# Altium PCB SWC_PCB1.PcbDoc
Units mm, origin at the board's own origin, x right, y up, seen from the top; angles counter-clockwise.
Board outline 45 x 51 mm, 2 copper layers (Top Layer, Bottom Layer); 74 components, 51 nets, 201 pads, 39 vias.
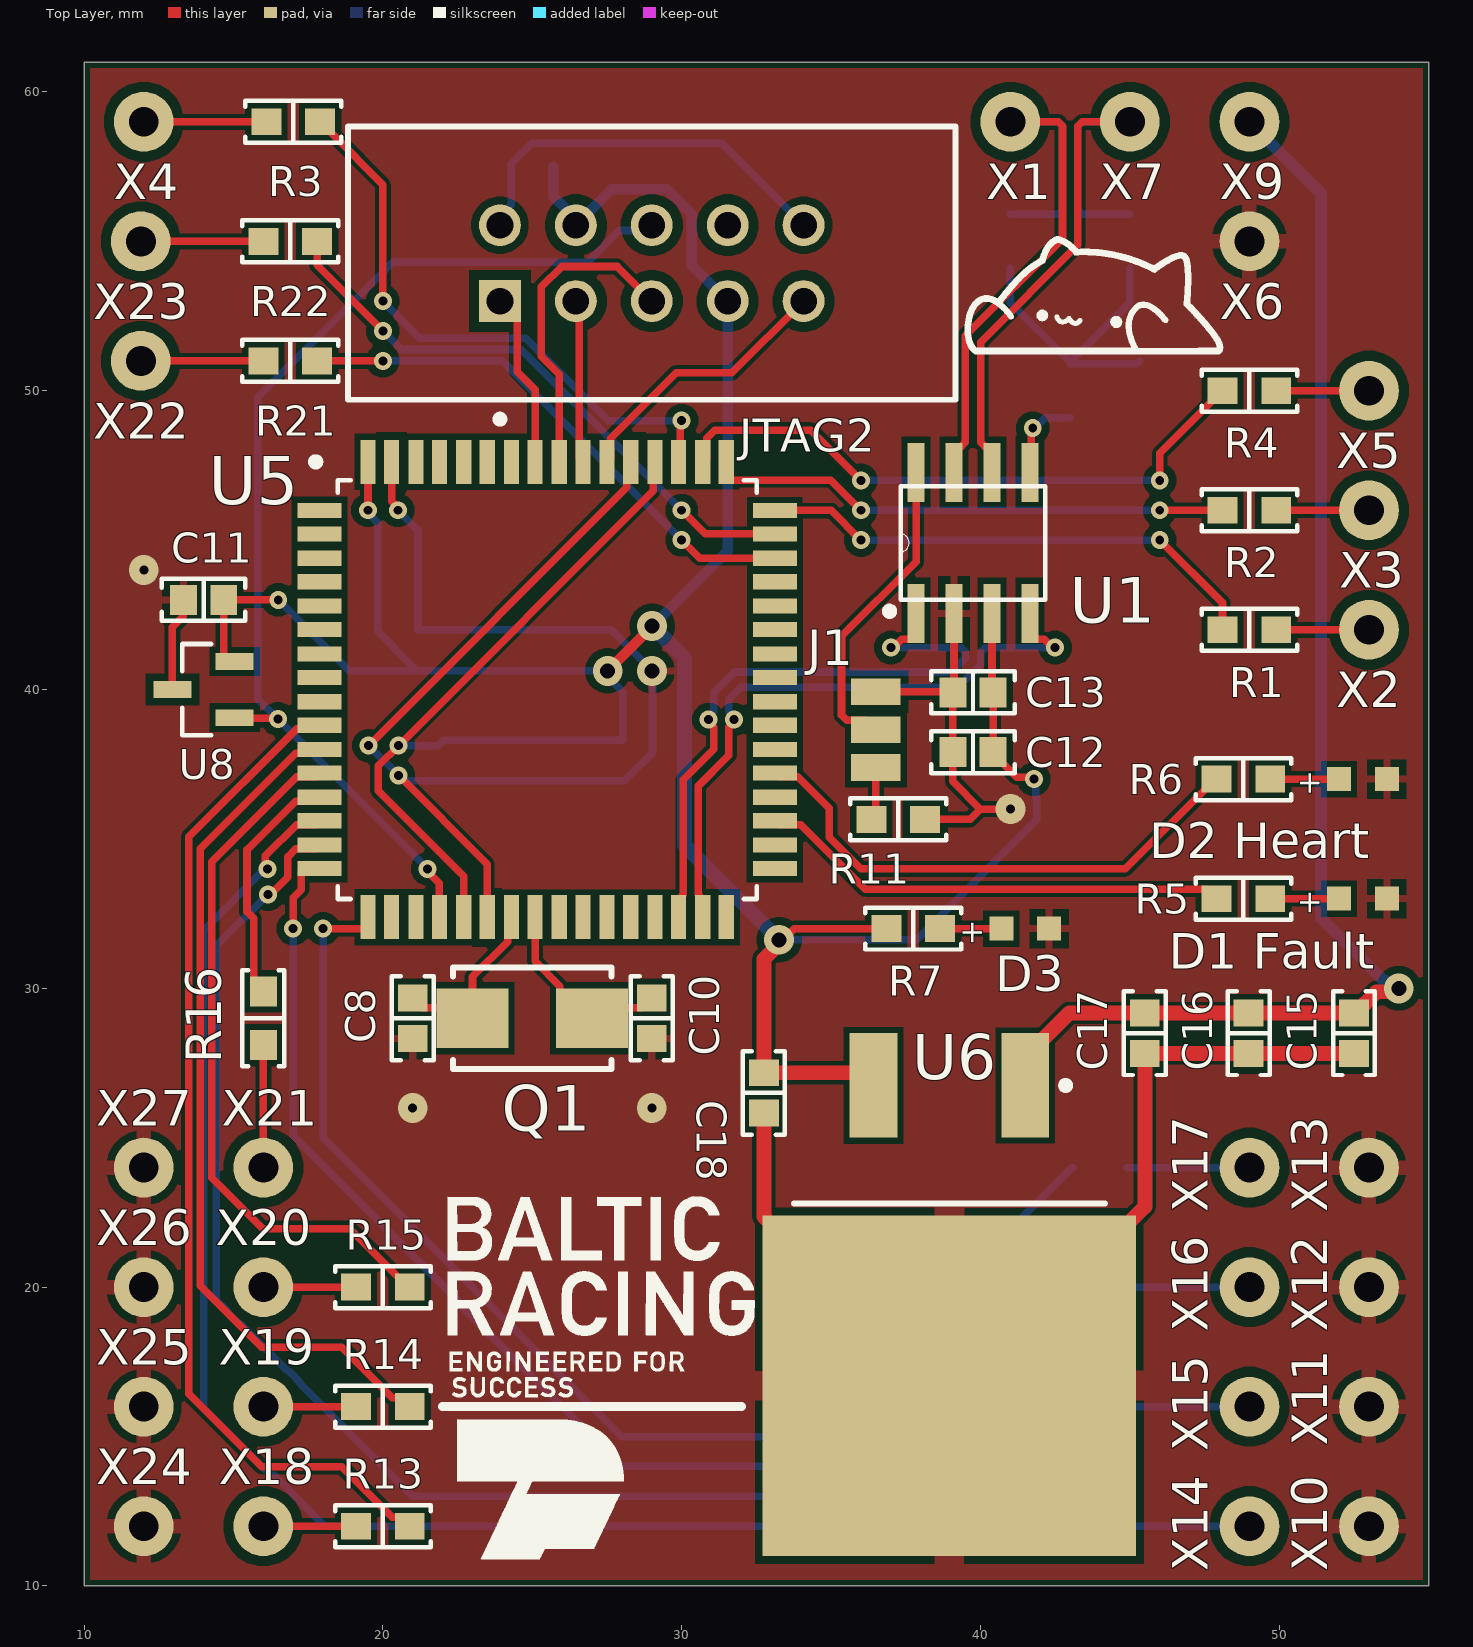
[diagram p0: Top Layer view]
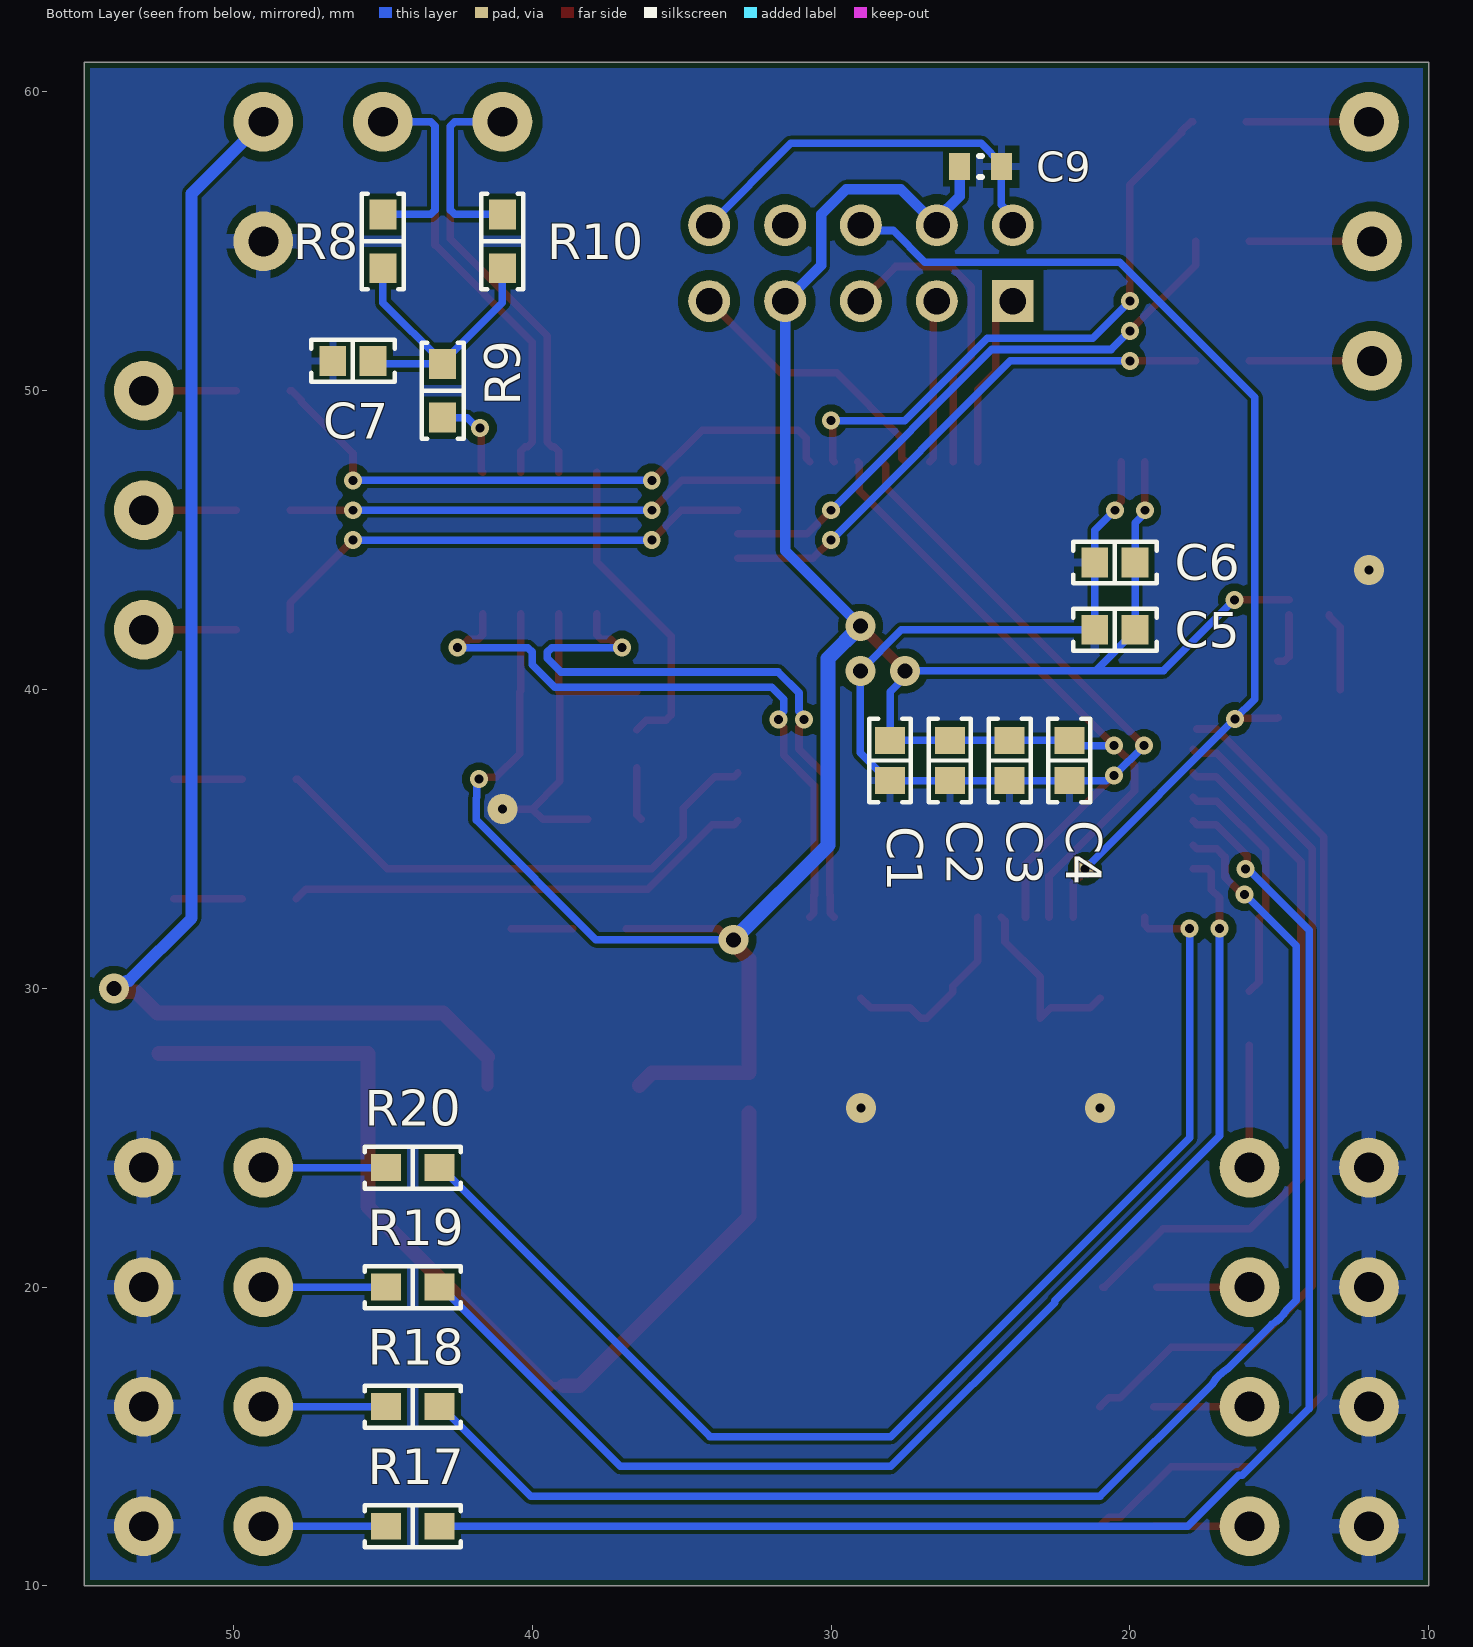
[diagram p1: Bottom Layer view, seen from below]
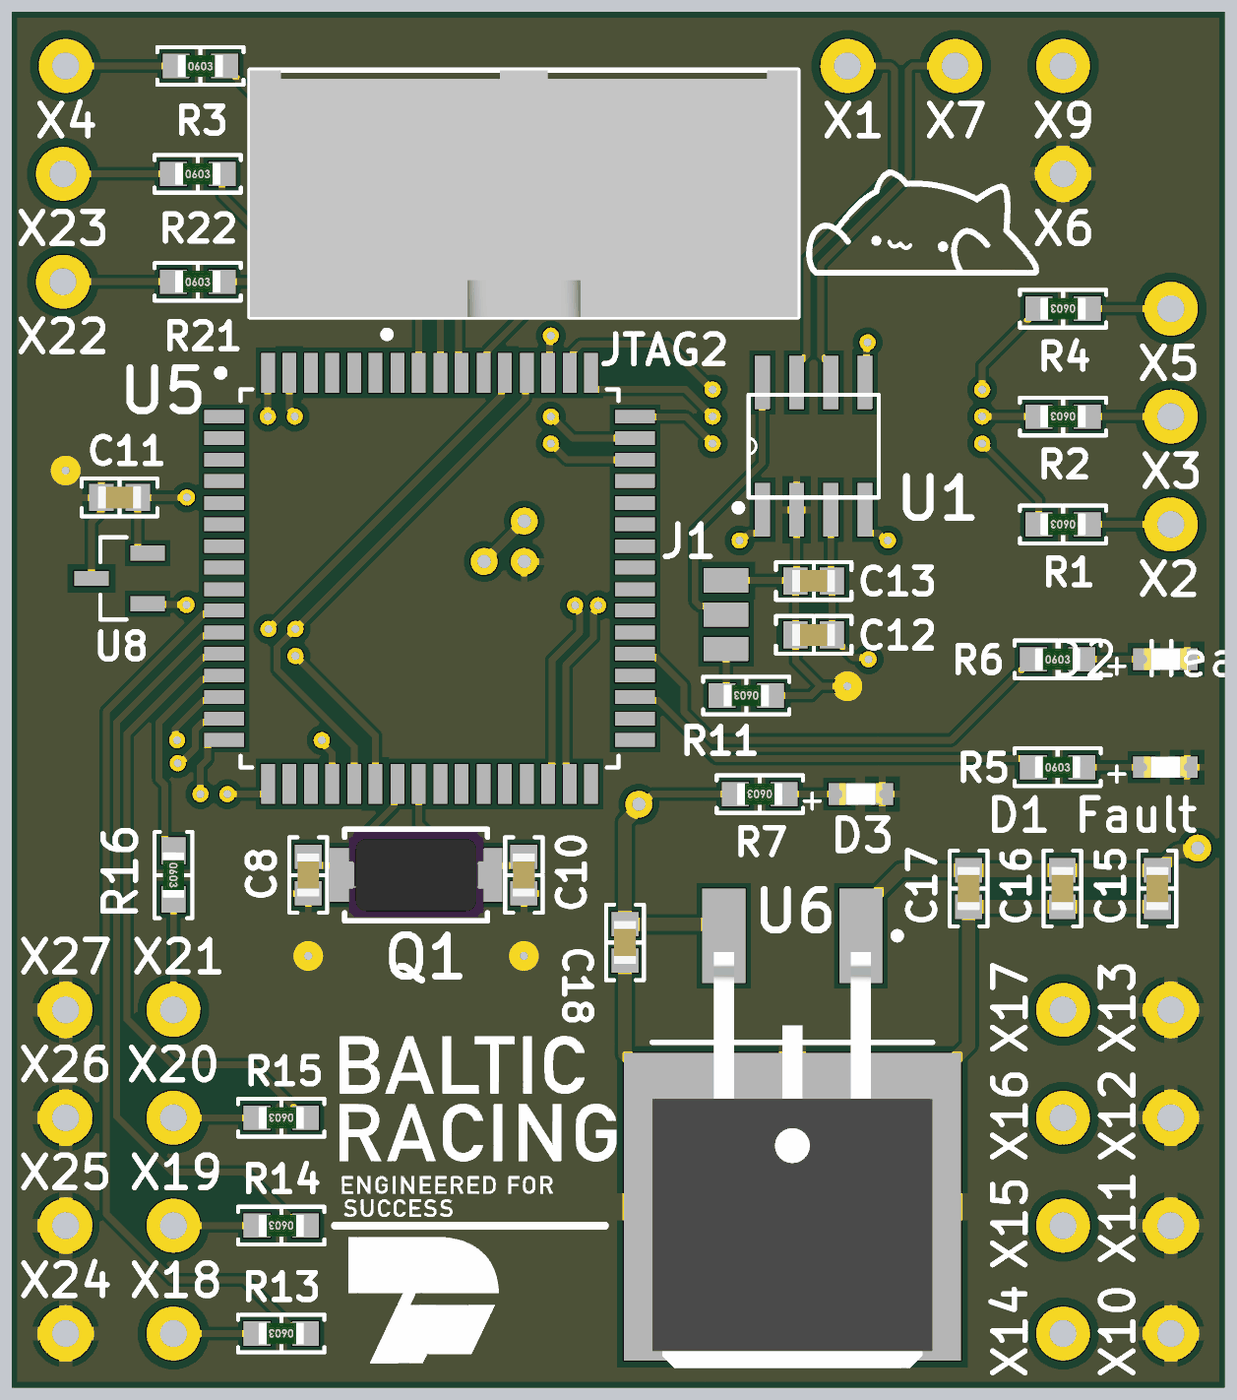
[diagram p2: 3D render of the assembled board from above, using the file's embedded part models]
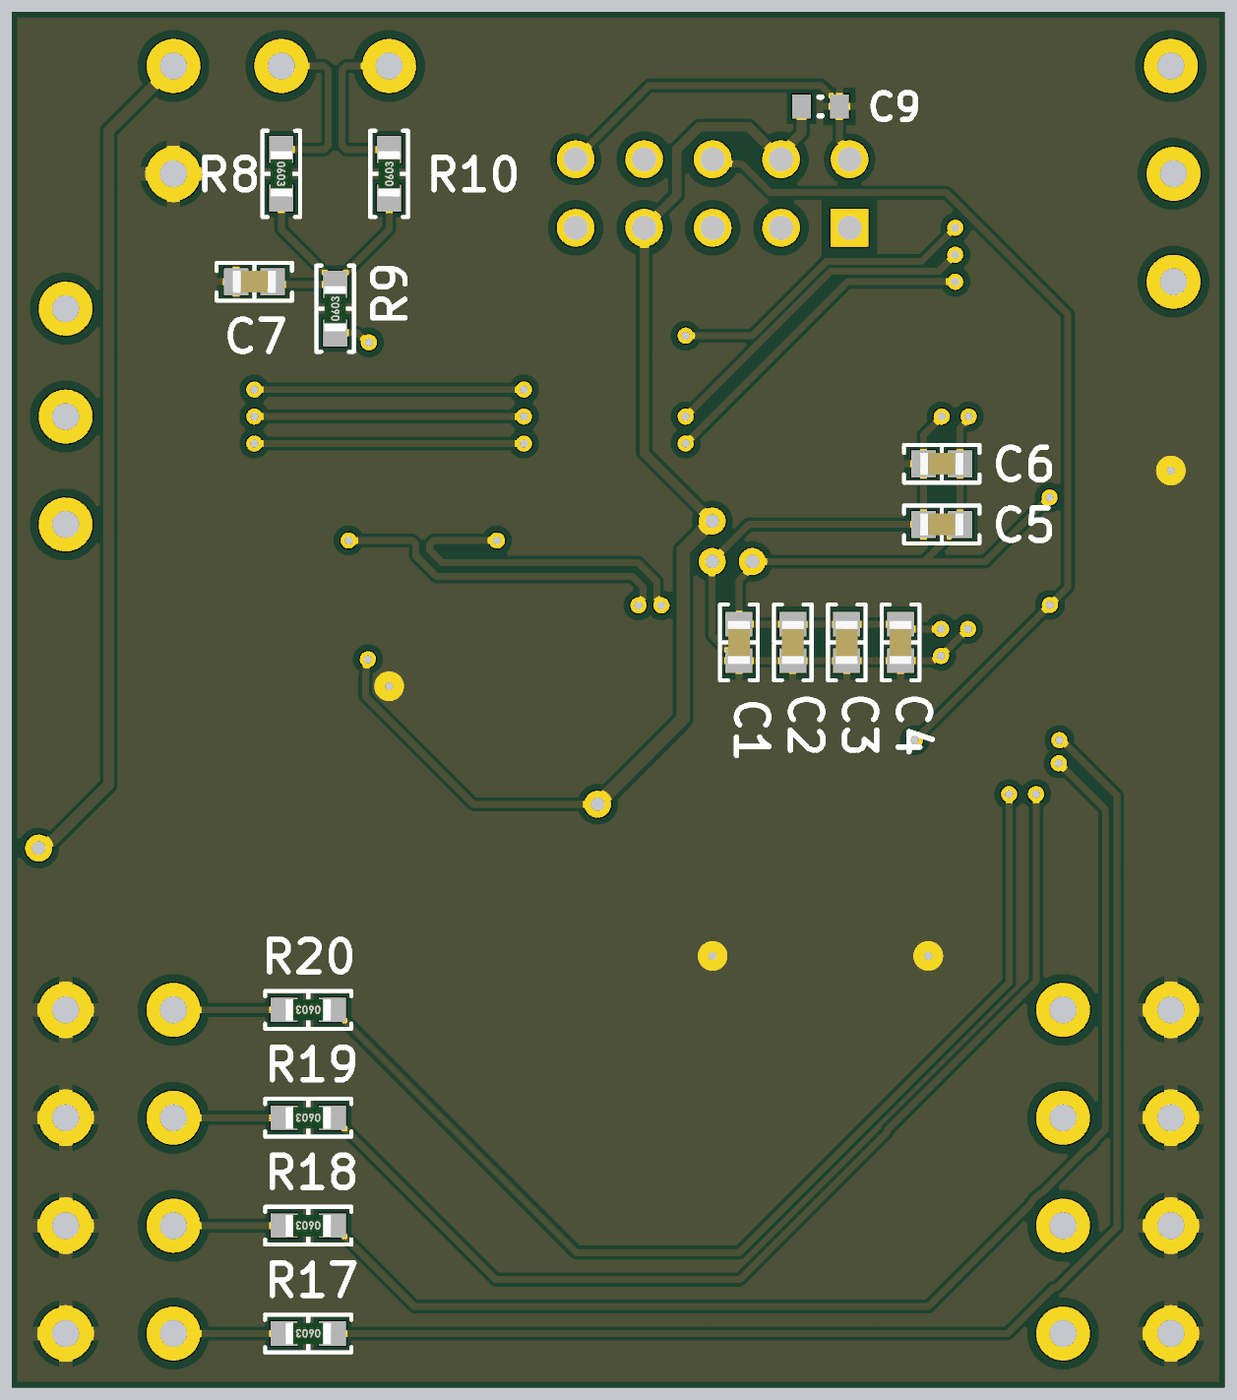
[diagram p3: 3D render of the assembled board from below, using the file's embedded part models]

## Layer stack, top to bottom
Top Solder: solder mask 0.0102, Solder Resist, Dk 3.5
Top Layer: signal copper 0.0356
Dielectric 1: dielectric 0.32, FR-4, Dk 4.8
Bottom Layer: signal copper 0.0356
Bottom Solder: solder mask 0.0102, Solder Resist, Dk 3.5

## Board outline
10,10 55,10 55,61 10,61

## Design rules (kind name [scope] priority, off if disabled: settings)
BoardOutlineClearance [All] p1: gap=0.2 ignorepadtopadclearanceinfootprint=FALSE // Trace to V-cut >0.4mm
Clearance [All] p1: gap=0.254 ignorepadtopadclearanceinfootprint=TRUE except(0: Arc-Hole Track-Hole SMDPad-Hole THPad-Hole Via-Hole Fill-Hole Poly-Hole Region-Hole Text-Hole; 0.127: Arc-Arc Arc-Track Arc-Fill Arc-Poly Arc-Region Track-Track Track-Fill Track-Poly Track-Region SMDPad-SMDPad; 0.15: Arc-Text Track-Text SMDPad-Text THPad-Text Via-Text Fill-Text Poly-Text Region-Text Text-Text; 0.2: Arc-SMDPad Track-SMDPad SMDPad-Fill SMDPad-Poly SMDPad-Region; 0.33: Arc-THPad Track-THPad THPad-Fill THPad-Poly THPad-Region; 0.5: SMDPad-THPad THPad-THPad THPad-Via)
DiffPairsRouting [All] p1: maxlimit=10 minlimit=0.254 mostfreqgap=0.254 toplayer_minwidth=0.127 toplayer_maxwidth=5 toplayer_prefwidth=0.254 bottomlayer_minwidth=0.127 bottomlayer_maxwidth=5 bottomlayer_prefwidth=0.254 maxuncoupledlength=12.7
HoleSize [All] p1: absolutevalues=TRUE maxlimit=6.3 minlimit=0.2 maxpercent=80.000 minpercent=20.000 // Finished hole size tolerance +0.13/-0.08mm
HoleToHoleClearance [All] p1: gap=0.5 allowstackedmicrovias=TRUE
MinimumAnnularRing [All] p1: minimumring=0.13 // 1oz Copper
PolygonConnect [All] p1: connectstyle=Relief reliefconductorwidth=0.254 reliefentries=4 polygonreliefangle="90 Angle" airgapwidth=0.254
RoutingVias [All] p1: holewidth=0.711 width=1.27 viastyle="Through Hole" minholewidth=0.3 minwidth=0.6 maxholewidth=0.711 maxwidth=1.27
SolderMaskExpansion [All] p1: expansion=0.05 istentingtop=FALSE
Width [All] p1: maxlimit=4.5 minlimit=0.127 preferedwidth=0.254 minimp=50.000000 maximp=50.000000 favimp=50.000000
27 further rules are at their usual default settings.

## Classes and differential pairs
component class SWC_P01: C1 C2 C3 C4 C5 C6 C7 C8 C9 C10 C11 C12 C13 C17 C18 "D1 Fault" "D2 Heart" D3 J1 JTAG2 Q1 R1 R2 R3 R4 R5 R6 R7 R8 R9 R10 R11 R13 R14 R15 R16 R17 R18 R19 R20 R21 R22 U1 U6 U8 X1 X2 X3 X4 X5 X6 X7 X9 X10 X11 X12 X13 X14 X15 X16 X17 X18 X19 X20 X22 X23 X24 X25 X26 X27
differential pair X_CAN: +X_CAN_P -X_CAN_N
differential pair CAN: +CAN_P -CAN_N

## Components (designator, comment, footprint, x,y, rotation, side; value= is the part's Value field where it differs from the comment)
C1 "SMD Capacitor" "CAP 0603/1608" 28.025,37.625 r90 bottom value=1uF
C2 "SMD Capacitor" "CAP 0603/1608" 26.025,37.625 r90 bottom value=100nF
C3 "SMD Capacitor" "CAP 0603/1608" 24.025,37.625 r90 bottom value=1uF
C4 "SMD Capacitor" "CAP 0603/1608" 22.025,37.625 r90 bottom value=100nF
C5 "SMD Capacitor" "CAP 0603/1608" 20.5,42 r180 bottom value=1uF
C6 "SMD Capacitor" "CAP 0603/1608" 20.5,44.25 r180 bottom value=100nF
C7 "SMD Capacitor" "CAP 0603/1608" 46,51 r0 bottom value=4u7
C8 "SMD Capacitor" "CAP 0603/1608" 21,29 r90 top value=18pF
C9 "CAP 100nF 10V 0603(1608)" CAPC0603(1608)100_L 25,57.5 r180 bottom value=100nF
C10 "SMD Capacitor" "CAP 0603/1608" 29,29 r90 top value=18pF
C11 "SMD Capacitor" "CAP 0603/1608" 14,43 r180 top value=1uF
C12 "SMD Capacitor" "CAP 0603/1608" 39.75,37.905 r0 top value=100n
C13 "SMD Capacitor" "CAP 0603/1608" 39.75,39.905 r0 top value=100n
C15 "SMD Capacitor" "CAP 0603/1608" 52.5,28.5 r270 top value=100nF (schematic designator C17)
C16 "SMD Capacitor" "CAP 0603/1608" 48.975,28.5 r270 top value=220nF
C17 "SMD Capacitor" "CAP 0603/1608" 45.5,28.5 r270 top value=10nF (schematic designator C15)
C18 "SMD Capacitor" "CAP 0603/1608" 32.75,26.5 r270 top value=100nF
"D1 Fault" "Red, 2V, 150060RS75000" WL-SMCW_0603_H=0.7mm 52.8,33 r180 top
"D2 Heart" "Blue, 3.2V, 150060BS75000" WL-SMCW_0603_H=0.7mm 52.8,37 r180 top
D3 "Green, 3.2V, 150060GS75000" WL-SMCW_0603_H=0.7mm 41.5,32 r180 top
J1 "JUMPERID" SMD-JUMPER-3 36.5,38.655 r270 top net-tie
JTAG2 "5103309-1" TECO-5103309-1_V 29,54.27 r180 top
Q1 "16M" "NDK NX5032GA" 25,29 r180 top
R1 "SMD Resistor" "STACKPOLE CSR0603" 49,42 r180 top value=10k
R2 "SMD Resistor" "STACKPOLE CSR0603" 49,46 r180 top value=10k
R3 "SMD Resistor" "STACKPOLE CSR0603" 17,59 r0 top value=10k
R4 "SMD Resistor" "STACKPOLE CSR0603" 49,50 r180 top value=10k
R5 "SMD Resistor" "STACKPOLE CSR0603" 48.8,33 r0 top value=1k
R6 "SMD Resistor" "STACKPOLE CSR0603" 48.8,37 r0 top value=1k
R7 "SMD Resistor" "STACKPOLE CSR0603" 37.75,32 r180 top value=1k
R8 "SMD Resistor" "STACKPOLE CSR0603" 45,55 r270 bottom value=60
R9 "SMD Resistor" "STACKPOLE CSR0603" 43,50 r90 bottom value=300
R10 "SMD Resistor" "STACKPOLE CSR0603" 41,55 r90 bottom value=60
R11 "SMD Resistor" "STACKPOLE CSR0603" 37.25,35.655 r180 top
R13 "SMD Resistor" "STACKPOLE CSR0603" 20,12 r180 top value=10k
R14 "SMD Resistor" "STACKPOLE CSR0603" 20,16 r180 top value=10k
R15 "SMD Resistor" "STACKPOLE CSR0603" 20,20 r180 top value=10k
R16 "SMD Resistor" "STACKPOLE CSR0603" 16,29 r270 top value=10k
R17 "SMD Resistor" "STACKPOLE CSR0603" 44,12 r0 bottom value=10k
R18 "SMD Resistor" "STACKPOLE CSR0603" 44,16 r0 bottom value=10k
R19 "SMD Resistor" "STACKPOLE CSR0603" 44,20 r0 bottom value=10k
R20 "SMD Resistor" "STACKPOLE CSR0603" 44,24 r0 bottom value=10k
R21 "SMD Resistor" "STACKPOLE CSR0603" 16.9,51 r0 top value=10k
R22 "SMD Resistor" "STACKPOLE CSR0603" 16.9,55 r0 top value=10k
U1 "MCP2551-I/SN" *SOIC127P600X175-8N 39.75,44.905 r90 top
U5 "AT90CAN128-16AI" *QFP80P1600X1600X120-64N 25.5,40 r0 top
U6 "L7805ABD2T-TR" DPAK254P1542X460-3M 38.96,19.45 r270 top
U8 "MCP130T-450I/TT" *SOT95P237X112-3N 14,40 r90 top
X1 "SolderTerminal" SolderTerminal#1 41,59 r0 top
X2 "Switch2" SolderTerminal#1 53,42 r0 top
X3 "Switch1" SolderTerminal#1 53,46 r0 top
X4 "Button_Left" SolderTerminal#1 12,59 r0 top
X5 "Button_Right" SolderTerminal#2 52.9,50 r0 top
X6 "SolderTerminal" SolderTerminal#1 49,55 r0 top
X7 "SolderTerminal" SolderTerminal#1 45,59 r0 top
X9 "SolderTerminal" SolderTerminal#1 49,59 r0 top
X10 "SolderTerminal" SolderTerminal#1 53,12 r90 top
X11 "SolderTerminal" SolderTerminal#1 53,16 r0 top
X12 "SolderTerminal" SolderTerminal#1 53,20 r90 top
X13 "SolderTerminal" SolderTerminal#1 53,24 r90 top
X14 "SolderTerminal" SolderTerminal#1 49,12 r90 top
X15 "SolderTerminal" SolderTerminal#1 49,16 r90 top
X16 "SolderTerminal" SolderTerminal#1 49,20 r90 top
X17 "SolderTerminal" SolderTerminal#1 49,24 r90 top
X18 "SolderTerminal" SolderTerminal#1 16,12 r90 top
X19 "SolderTerminal" SolderTerminal#1 16,16 r90 top
X20 "SolderTerminal" SolderTerminal#1 16,20 r90 top
X21 "SolderTerminal" SolderTerminal#1 16,24 r0 top
X22 "Switch4" SolderTerminal#1 11.9,51 r90 top
X23 "Switch3" SolderTerminal#1 11.9,55 r90 top
X24 "SolderTerminal" SolderTerminal#1 12,12 r90 top
X25 "SolderTerminal" SolderTerminal#1 12,16 r90 top
X26 "SolderTerminal" SolderTerminal#1 12,20 r90 top
X27 "SolderTerminal" SolderTerminal#1 12,24 r90 top

## Footprints (in the part's own frame and the unit in brackets; to place one, negate y for a bottom-side part, rotate by r counter-clockwise, add the part's x,y. Pads: shape width x height; smd on the part's side, far side on the other; paste and mask are expansions set on the pad)
*QFP80P1600X1600X120-64N [mil]
  rect 58x20 smd: 1(-300,236) 2(-300,205) 3(-300,173) 4(-300,142) 5(-300,110) 6(-300,79) 7(-300,47) 8(-300,16) 9(-300,-16) 10(-300,-47) 11(-300,-79) 12(-300,-110) 13(-300,-142) 14(-300,-173) 15(-300,-205) 16(-300,-236) 33(300,-236) 34(300,-205) 35(300,-173) 36(300,-142) 37(300,-110) 38(300,-79) 39(300,-47) 40(300,-16) 41(300,16) 42(300,47) 43(300,79) 44(300,110) 45(300,142) 46(300,173) 47(300,205) 48(300,236)
  rect 20x58 smd: 17(-236,-300) 18(-205,-300) 19(-173,-300) 20(-142,-300) 21(-110,-300) 22(-79,-300) 23(-47,-300) 24(-16,-300) 25(16,-300) 26(47,-300) 27(79,-300) 28(110,-300) 29(142,-300) 30(173,-300) 31(205,-300) 32(236,-300) 49(236,300) 50(205,300) 51(173,300) 52(142,300) 53(110,300) 54(79,300) 55(47,300) 56(16,300) 57(-16,300) 58(-47,300) 59(-79,300) 60(-110,300) 61(-142,300) 62(-173,300) 63(-205,300) 64(-236,300)
  silkscreen extent -310,-276 276,305, body extent -270,-270 270,270, height 30
*SOIC127P600X175-8N [mil]
  rect 78x22 smd: 1(-93,75) 2(-93,25) 3(-93,-25) 4(-93,-75) 5(93,-75) 6(93,-25) 7(93,25) 8(93,75)
  silkscreen extent -95,-95 75,115, body extent -75,-95 75,95, height 80
*SOT95P237X112-3N [mil]
  rect 22x50 smd: 1(-37,-41) 2(37,-41) 3(0,41)
  silkscreen extent -60,-10 60,28, body extent -60,-25 60,25, height 50
"CAP 0603/1608" [mm] "Chip Capacitor, 2-Leads, Body 1.60x0.80mm, IPC Medium Density"
  rect 0.9x1 smd: 1(-0.675,0) 2(0.675,0)
  silkscreen extent -1.4,-0.7 1.4,0.7, body extent -0.8,-0.41 0.8,0.41, height 0.82
CAPC0603(1608)100_L [mm] "Chip Capacitor, Body 1.6x0.8mm, Height 1.0mm, IPC High Density"
  rect 0.7x0.9 smd: 1(-0.7,0) 2(0.7,0)
  silkscreen extent -0.05,-0.35 0.05,0.35, body extent -0.87,-0.47 0.88,0.48, height 1
DPAK254P1542X460-3M [mm] "D2-PAK, 3-Pads, Body 7,78x8,56mm (max), IPC Low Density"
  rect 3.5x1.6 smd: 1(-7.3,2.54) 3(-7.3,-2.54)
  rect 11.4x12.5 smd: 4(2.75,0)
  silkscreen extent -7.42,-5.2 -3.35,5.2, body extent -6.69,-5.2 8.73,5.2, height 4.63
"NDK NX5032GA" [mm] "Crystal, 2-Leads, Body 5.00x3.20mm, IPC Medium Density"
  rect 2.4x2 smd: 1(-2,0) 2(2,0)
  silkscreen extent -2.65,-1.7 2.65,1.7, body extent -2.5,-1.6 2.5,1.6, height 1.2
SMD-JUMPER-3 [mm] "Jumper, SMD"
  rect 0.9x1.65 smd: 1(-1.27,0) 2(0,0) 3(1.27,0)
SolderTerminal#1 [mm]
  round 2 hole 1: 1(0,0)
SolderTerminal#2 [mm]
  round 2 hole 1: 1(0.1,0)
"STACKPOLE CSR0603" [mm] "Chip Resistor, 2-Leads, Body 1.60x0.80mm, IPC Medium Density"
  rect 1x0.9 smd: 1(-0.9,0) 2(0.9,0)
  silkscreen extent -1.6,-0.7 1.6,0.7, body extent -0.85,-0.4 0.85,0.4, height 0.45
TECO-5103309-1_V [mm] "Male Header, 10-Leads, Body 20.32x9.144mm, Pitch 2.54mm"
  rect 1.4x1.4 hole 0.889: 1(5.08,1.27)
  round 1.4 hole 0.889: 2(5.08,-1.27) 3(2.54,1.27) 4(2.54,-1.27) 5(0,1.27) 6(0,-1.27) 7(-2.54,1.27) 8(-2.54,-1.27) 9(-5.08,1.27) 10(-5.08,-1.27)
  silkscreen extent -10.16,-4.57 10.16,5.35, body extent -10.16,-4.57 10.16,4.57, height 9.85
WL-SMCW_0603_H=0.7mm [mm] "SMD Mono-color Chip LED, body 1.6x0.8mm"
  rect 0.8x0.8 smd: 1(-0.8,0) 2(0.8,0)
  body extent -0.8,-0.4 0.8,0.4, height 0.7

## Part data
C1 C2 C3 C4 C5 C6 C7 C8 C10 C11 C12 C13 C15 C16 C17 C18: "Capacitor with multiple Footprints"
C9: library part CMP-1035-02579-1, "CAP 100nF 10V ±5% 0603 (1608 Metric) Thickness 1mm SMD", Case-EIA=0603, Case-Metric=1608, Rated Voltage="10 V", Tolerance=Â±5%, Max Thickness="1 mm", Technology=SMT
"D1 Fault": library part 150060RS75000, "WL-SMCW SMT Mono-color Chip LED Waterclear, size 0603, Red, 2V, 140deg", Emitting Color=Red, Forward Voltage typ.=2V, Operating Temperature="-40 to +85degC", Chip Technology=AlInGaP, ComponentLink1Description=Manufacturer, ComponentLink1URL=http://www.we-online.de, ComponentLink2Description=Datasheet, ComponentLink2URL=https://www.we-online.com/catalog/datasheet/150060RS75000.pdf, Dominant Wavelength typ.=625nm, Luminous Intensity typ.=250mcd, Mounting Technology=SMT, Packaging="Tape and Reel", Part Number=150060RS75000, Peak Wavelength typ.=630nm, Published Date="December 2019", Publisher="Wurth Elektronik", Size=0603, Viewing Angle=140deg
"D2 Heart": library part 150060BS75000, "WL-SMCW SMT Mono-color Chip LED Waterclear, size 0603, Blue, 3.2V, 140deg", Emitting Color=Blue, Forward Voltage typ.=3.2V, Operating Temperature="-40 to +85degC", Chip Technology=InGaN, ComponentLink1Description=Manufacturer, ComponentLink1URL=http://www.we-online.de, ComponentLink2Description=Datasheet, ComponentLink2URL=https://www.we-online.com/catalog/datasheet/150060BS75000.pdf, Dominant Wavelength typ.=470nm, Luminous Intensity typ.=145mcd, Mounting Technology=SMT, Packaging="Tape and Reel", Part Number=150060BS75000, Peak Wavelength typ.=465nm, Published Date="December 2019", Publisher="Wurth Elektronik", Size=0603, Viewing Angle=140deg
D3: library part 150060GS75000, "WL-SMCW SMT Mono-color Chip LED Waterclear, size 0603, Green, 3.2V, 140deg", Emitting Color=Green, Forward Voltage typ.=3.2V, Operating Temperature="-40 to +85degC", Chip Technology=InGaN, ComponentLink1Description=Manufacturer, ComponentLink1URL=http://www.we-online.de, ComponentLink2Description=Datasheet, ComponentLink2URL=https://www.we-online.com/catalog/datasheet/150060GS75000.pdf, Dominant Wavelength typ.=525nm, Luminous Intensity typ.=430mcd, Mounting Technology=SMT, Packaging="Tape and Reel", Part Number=150060GS75000, Peak Wavelength typ.=515nm, Published Date="December 2019", Publisher="Wurth Elektronik", Size=0603, Viewing Angle=140deg
J1: library part "SMD Jumper 3"
JTAG2: library part CMP-2000-07502-1, "Male Header, Pitch 2.54 mm, 2 x 5 Position, Height 9.855 mm, Tail Length 3.048 mm, -65 to 105 degC, RoHS, Tube", Colour=Black, Current Rating=1A, Flammability Rating=UL94V-0, Insulation Resistance=5GR, Manufacturer="TE Connectivity", Max Operating Temperature=105degC, Min Operating Temperature=-65degC, Package Description="Male Header, Pitch 2.54 mm, 2 x 5 Position, Height 9.855 mm, Tail Length 3.048 mm", Package Quantity=35, Board Standoff=Yes(With), Body Material=Thermoplastic, Connector System=Wire-to-Board, Connector Type=Header, Contact Gender=Male, Contact Material=CopperAlloy, Contact Mating Length=0.24inch, Contact Plating=Gold, Contact Shape=Square, Datasheet URL=http://www.te.com/commerce/DocumentDelivery/DDEController?Action=showdoc&DocId=Customer+Drawing%7F5103309%7FE1%7Fpdf%7FEnglish%7FENG_CD_5103309_E1.pdf%7F5103309-1, Datasheet Version="Rev. E1, 03/2011", Depth=9.14mm, ELV=Compliant, Gender=Male, Height=8.813mm, Housing Colour=Black, Housing Material=PBT, Lead Free=LeadFree, Length=0.8inch, Manufacturer URL=http://www.te.com/, Mating Alignment=Yes(With), Mating Connector Lock=No(Without), Mating Retention=No(Without), Max Current Rating=1A, Mount=ThroughHole, Mounting Technology=ThroughHole, Number Of Contacts=10, Number of Positions=10, Number of Rows=2, Orientation=Straight, Package Reference=5103309-1, Packaging=Rail/Tube, Panel Mount Retention=No(Without), PCB Mount Alignment=No(Without), PCB Mount Retention=Without, PCB Mounting Orientation=Vertical, Pitch=2.54mm, REACH SVHC=NoSVHC, RoHSCompliant=True, Row Spacing=2.54mm, Shrouded=Yes(With), Shrouded End Dimension=3.81mm, Termination=ThroughHole, Termination Post Length=0.12inch
Q1: library part "16 MHz Quartz", "16 MHz Quartz"
R1 R2 R3 R4 R5 R6 R7 R8 R9 R10 R11 R13 R14 R15 R16 R17 R18 R19 R20 R21 R22: "Resistor with multiple footprints"
U1: "MCP2551 Series 5.5 V 1 Mb/s Surface Mount High-Speed CAN Transceiver - SOIC-8", Package="SOIC-8 Microchip", Availability=Unavailable, MF=Microchip, MP=MCP2551-I/SN, Price=None, SnapEDA_Link=https://www.snapeda.com/parts/MCP2551-I/SN/Microchip/view-part/?ref=snap
U5: "Ic Mcu 8bit 128kb Flash 64tqfp", Package="TQFP-64 Microchip", Availability=Unavailable, MF=Microchip, MP=AT90CAN128-16AI, Price=None, SnapEDA_Link=https://www.snapeda.com/parts/AT90CAN128-16AI/Microchip/view-part/?ref=snap
U6: "Linear Voltage Regulators 5.0V 1.5A Positive"
U8: "System Supervisors - Power Supply Monitors with Reset Generators Open Drain Low", Package="SOT-23-3 Microchip", Availability=Unavailable, MF=Microchip, MP=MCP120T-450I/TT, Price=None, SnapEDA_Link=https://www.snapeda.com/parts/MCP120T-450I/TT/Microchip/view-part/?ref=snap
X2 X3 X4 X5 X22 X23: library part SolderTerminal

## Via types
v1: diameter 0.6, hole 0.3, Top Layer to Bottom Layer, 30 vias
v2: diameter 1, hole 0.5, Top Layer to Bottom Layer, 5 vias
v3: diameter 1, hole 0.3, Top Layer to Bottom Layer, 4 vias

## Nets (pads, with @x,y where several pads share a name; then routed paths per layer and width w, separated by ;. In a path a pad name is that pad's centre, name@x,y a point inside that pad or via, vN(x,y) a via of type N, cw(c..) or ccw(c..) an arc to the next point about the centre after c; other vN are vias at no path point)
+5V: C1.2 C2.2 C3.2 C4.2 C5.2 C6.2 C9.1 C11.1 C12.2 C13.2 C18.1 JTAG2.4 JTAG2.7 R7.2 U1.3 U5.21 U5.52 U5.64 U6.3 U8.2 | length 121.3
  Top Layer w0.254: 14.675,42.5 14.675,41.092 14.827,40.94 U8.2 ; C11.1 v1(16.5,43) ; v1(19.5,46) 19.503,46.003 19.503,47.617 U5.64 U5.64@19.506,47.137 ; U5.21 22.706,33.757 19.844,36.619 19.844,37.444 v1(20.525,38.125) 29.053,46.653 29.053,47.566 U5.52 ; v2(27.525,40.625) v2@27.525,40.631 ; v2@29.013,42.119 v2(29.013,42.125) ; v2@33.399,31.625 33.774,32 R7.2 ; U1.3 40.385,39.945 C13.2 C12.2 40.425,37.855 41.214,37.066 41.721,37.066 v1(41.787,37)
  Top Layer w0.35: v2@27.525,40.631 v2@29.013,42.119
  Top Layer w0.5: v2@33.399,31.625 v2(33.263,31.625) 33.263,31.49 32.75,30.976 C18.1 35.995,27.175 U6.3
  Bottom Layer w0.254: v1(16.5,43) 18.875,40.625 21.138,40.625 ; v1(19.5,46) 19.5,45.906 19.825,45.581 C6.2 C5.2 19.825,41.95 20.398,41.377 20.398,41.365 21.138,40.625 ; v1(20.525,38.125) 21.85,38.125 C4.2 C3.2 C2.2 C1.2 28.025,39.923 27.525,40.423 v2(27.525,40.625) 21.138,40.625 ; v2(33.263,31.625) 37.871,31.625 41.881,35.635 41.881,36.365 41.853,36.393 41.853,36.934 v1(41.787,37)
  Bottom Layer w0.35: C9.1 25.7,56.512 26.46,55.752 JTAG2.4 27.665,56.745 29.499,56.745 30.335,55.909 30.335,54.205 JTAG2.7 31.54,44.652 v2(29.013,42.125)
  Bottom Layer w0.5: v2(29.013,42.125) 30.096,41.042 30.096,34.792 v2(33.263,31.625)
+24: C15.1 C16.1 C17.1 U6.1 X9.1 | length 45.6
  Top Layer w0.4: U6.1 U6.1@41.5,27.7 ; C15.1 C15.1@52.55,29.175 ; v2@53.885,29.885 v2(54,30)
  Top Layer w0.5: U6.1@41.5,27.7 42.975,29.175 C17.1 C16.1 C15.1 ; C15.1@52.55,29.175 53.26,29.885 v2@53.885,29.885
  Bottom Layer w0.4: X9.1 51.4,56.6 51.4,32.35 53.497,30.253 53.585,30.253 53.838,30 v2(54,30)
CAN_N: R8.1 U1.6 X7.1 | length 21.4
  Top Layer w0.254: U1.6 40.385,47.978 40.233,48.131 40.153,48.131 40.004,48.28 40.004,51.628 43.254,54.878 43.254,58.851 43.403,59 X7.1
  Bottom Layer w0.254: R8.1 43.403,55.9 43.254,56.049 43.254,58.851 43.403,59 X7.1
CAN_P: R10.2 U1.7 X1.1 | length 21.4
  Top Layer w0.254: U1.7 39.115,47.978 39.267,48.131 39.347,48.131 39.496,48.28 39.496,51.839 42.746,55.089 42.746,58.851 42.597,59 X1.1
  Bottom Layer w0.254: R10.2 42.597,55.9 42.746,56.049 42.746,58.851 42.597,59 X1.1
GND: "D1 Fault.1" "D2 Heart.1" C1.1 C2.1 C3.1 C4.1 C5.1 C6.1 C7.2 C8.1 C9.2 C10.1 C11.2 C12.1 C13.1 C15.2 C16.2 C17.2 C18.2 D3.1 J1.1 JTAG2.2 JTAG2.10 R11.1 U1.2 U5.22 U5.53 U5.63 U6.4 U8.3 X6.1 X10.1 X11.1 X12.1 X13.1 X24.1 X25.1 X26.1 X27.1 | length 108.4
  Top Layer w0.254: U8.3 12.959,42.084 13.325,42.45 13.325,42.5 ; v1(19.525,38.125) 28.167,46.767 28.167,47.493 U5.53 ; U5.63 20.293,46.301 20.5,46.094 v1(20.5,46) ; v1(20.525,37.125) 23.493,34.157 U5.22 ; J1.1 39.055,39.925 C13.1 ; R11.1 39.655,35.655 40,36 ; U6.4 U6.4@39.51,16.7 ; U1.2 39.115,39.945 C13.1 ; v3(41,36) 40,36 ; C13.1 C12.1 39.075,36.925 40,36
  Top Layer w0.5: C18.2 32.75,22.36 38.41,16.7 U6.4 ; U6.4@39.51,16.7 45.5,22.69 C17.2 C16.2 C15.2
  Bottom Layer w0.254: v1(19.525,38.125) v1(20.525,37.125) 20.619,37.125 20.794,36.95 C4.1 C3.1 C2.1 C1.1 28.075,36.95 28.648,37.523 28.66,37.523 29.025,37.888 v2@29.025,40.625 ; v1(20.5,46) 21.175,45.325 C6.1 C5.1 27.65,42 29.013,40.637 v2(29.013,40.625) ; JTAG2.2 23.92,55.85 24.3,56.23 C9.2 24.3,57.6 24.977,58.277 31.343,58.277 JTAG2.10
  other v3: 21,26 29,26 12,44
JTAG_TCK: JTAG2.1 U5.57 | length 5.9
  Top Layer w0.254: JTAG2.1 24.493,52.427 24.493,50.629 25.094,50.028 U5.57
JTAG_TDI: JTAG2.9 U5.54 | length 9.2
  Top Layer w0.254: U5.54 27.634,47.747 27.634,48.413 29.818,50.597 31.677,50.597 JTAG2.9
JTAG_TDO: JTAG2.3 U5.55 | length 5.5
  Top Layer w0.254: JTAG2.3 26.577,52.883 26.577,47.737 U5.55
JTAG_TMS: JTAG2.5 U5.56 | length 10.6
  Top Layer w0.254: U5.56 25.906,50.553 25.303,51.156 25.303,53.479 25.981,54.157 27.843,54.157 JTAG2.5
NetC7_1: C7.1 R8.2 R9.2 R10.1 | length 10.3
  Bottom Layer w0.254: R10.1 41,52.95 43,50.95 45,52.95 R8.2 ; R9.2 45.225,50.9 C7.1
NetC8_2: C8.2 Q1.2 U5.23 | length 6.2
  Top Layer w0.254: C8.2 21.323,29.352 22.648,29.352 Q1.2 23,30.381 24.179,31.56 24.179,32.253 U5.23
NetC10_2: C10.2 Q1.1 U5.24 | length 6.6
  Top Layer w0.254: U5.24 25.094,30.906 25.927,30.073 25.927,29.873 26.8,29 Q1.1 27.352,29.352 28.677,29.352 C10.2
"NetD1 Fault_2": "D1 Fault.2" R5.2 | length 2.3
  Top Layer w0.254: R5.2 52,33
"NetD2 Heart_2": "D2 Heart.2" R6.2 | length 2.3
  Top Layer w0.254: R6.2 52,37
NetD3_2: D3.2 R7.1 | length 2
  Top Layer w0.254: R7.1 D3.2
NetJ1_2: J1.2 U1.8 | length 10.5
  Top Layer w0.254: J1.2 36.177,38.978 35.522,38.978 35.5,39 35.497,39 35.348,39.149 35.348,41.778 37.845,44.275 U1.8
NetJ1_3: J1.3 R11.2 | length 1.8
  Top Layer w0.254: R11.2 36.5,35.805 J1.3
NetR1_1: R1.1 X2.1 | length 3.1
  Top Layer w0.254: R1.1 X2.1
NetR1_2: R1.2 U5.48 | length 17.2
  Top Layer w0.254: U5.48 35.006,45.994 v1(36,45) ; v1(46,45) 48.1,42.9 R1.2
  Bottom Layer w0.254: v1(36,45) v1(46,45)
NetR2_1: R2.1 X3.1 | length 3.1
  Top Layer w0.254: R2.1 X3.1
NetR2_2: R2.2 U5.49 | length 17.6
  Top Layer w0.254: U5.49 31.494,47.137 31.621,47.01 34.99,47.01 v1(36,46) ; v1(46,46) R2.2
  Bottom Layer w0.254: v1(36,46) v1(46,46)
NetR3_1: R3.1 X4.1 | length 4.1
  Top Layer w0.254: X4.1 R3.1
NetR3_2: R3.2 U5.51 | length 20
  Top Layer w0.254: R3.2 17.95,59 18.273,58.677 18.273,58.627 20,56.9 v1(20,53) ; U5.51 29.947,47.673 29.947,48.947 v1(30,49)
  Bottom Layer w0.254: v1(20,53) 21.238,51.762 24.777,51.762 27.539,49 v1(30,49)
NetR4_1: R4.1 X5.1 | length 3.1
  Top Layer w0.254: R4.1 X5.1
NetR4_2: R4.2 U5.50 | length 20.7
  Top Layer w0.254: U5.50 30.834,47.747 30.834,48.413 31.105,48.684 34.316,48.684 v1(36,47) ; v1(46,47) 46,47.9 47.727,49.627 47.727,49.677 48.05,50 R4.2
  Bottom Layer w0.254: v1(36,47) v1(46,47)
NetR5_1: R5.1 U5.35 | length 15.9
  Top Layer w0.254: U5.35 33.247,35.479 33.982,35.479 36.138,33.323 47.577,33.323 R5.1
NetR6_1: R6.1 U5.37 | length 17.9
  Top Layer w0.254: U5.37 33.247,37.079 33.887,37.079 34.944,36.023 34.944,35.056 36,34 44.85,34 47.85,37 R6.1
NetR9_1: R9.1 U1.5 | length 2.9
  Top Layer w0.254: U1.5 41.702,47.315 41.702,48.702 v1(41.75,48.75)
  Bottom Layer w0.254: v1(41.75,48.75) 41.819,48.75 42.169,49.1 R9.1
NetR13_2: R13.2 X18.1 | length 3.2
  Top Layer w0.254: X18.1 R13.2@19.2,12
NetR14_2: R14.2 X19.1 | length 3.2
  Top Layer w0.254: X19.1 R14.2@19.2,16
NetR15_2: R15.2 X20.1 | length 3.1
  Top Layer w0.254: X20.1 R15.2
NetR16_2: R16.2 X21.1 | length 4.1
  Top Layer w0.254: X21.1 R16.2
NetR17_2: R17.2 X14.1 | length 4.1
  Bottom Layer w0.254: R17.2 X14.1
NetR18_2: R18.2 X15.1 | length 4.1
  Bottom Layer w0.254: R18.2 X15.1
NetR19_2: R19.2 X16.1 | length 4.1
  Bottom Layer w0.254: R19.2 X16.1
NetR20_2: R20.2 X17.1 | length 4.1
  Bottom Layer w0.254: R20.2 X17.1
NetR21_1: R21.1 X22.1 | length 4.1
  Top Layer w0.254: X22.1 R21.1
NetR21_2: R21.2 U5.46 | length 18.1
  Top Layer w0.254: R21.2 v1(20,51) ; v1(30,45) 30.606,44.394 U5.46
  Bottom Layer w0.254: v1(20,51) 24,51 v1(30,45)
NetR22_1: R22.1 X23.1 | length 4.1
  Top Layer w0.254: X23.1 R22.1
NetR22_2: R22.2 U5.47 | length 19.8
  Top Layer w0.254: R22.2 17.8,54.2 v1(20,52) ; v1(30,46) 30.793,45.207 U5.47
  Bottom Layer w0.254: v1(20,52) 20.619,51.381 24.619,51.381 v1(30,46)
RE1.1: R13.1 U5.10 | length 33.7
  Top Layer w0.254: U5.10@17.753,38.679 17.113,38.679 13.511,35.077 13.511,16.428 15.949,13.991 18.621,13.991 20.316,12.297 20.703,12.297 R13.1@21,12
RE1.2: R14.1 U5.11 | length 28.8
  Top Layer w0.254: U5.11 17.753,37.866 17.087,37.866 13.892,34.671 13.892,20.047 15.949,17.991 18.621,17.991 20.316,16.297 20.703,16.297 R14.1@21,16
RE1.3: R15.1 U5.12 | length 23.6
  Top Layer w0.254: U5.12 17.753,37.079 17.113,37.079 14.273,34.239 14.273,23.666 15.979,21.96 18.89,21.96 20.85,20 R15.1
RE1.4: R16.1 U5.13 | length 8.1
  Top Layer w0.254: R16.1 15.677,30.223 15.677,32.342 15.454,32.564 15.454,34.633 17.087,36.266 17.753,36.266 U5.13
RE2.1: R17.1 U5.14 | length 52.5
  Top Layer w0.254: v1(16.135,34) 16.069,34.066 16.069,34.429 16.066,34.432 17.113,35.479 17.753,35.479 U5.14
  Bottom Layer w0.254: v1(16.135,34) 16.049,34 14,31.951 14,15.939 16.241,13.698 16.362,13.698 18.061,12 R17.1
RE2.2: R18.1 U5.15 | length 49.7
  Top Layer w0.254: v1(16.159,33.146) 16.245,33.146 16.816,33.718 16.816,34.395 17.087,34.666 17.753,34.666 U5.15
  Bottom Layer w0.254: v1(16.159,33.146) 14.43,31.418 14.43,19.57 14.752,19.248 ccw(c16,20) 15.248,18.752 15.27,18.73 16.73,17.27 ccw(c16.911,17.448) 16.732,17.268 16.751,17.249 ; 16.752,17.248 cw(c16,16) 17.248,16.752 21,13 40.05,13 43.05,16 R18.1
RE2.3: R19.1 U5.16 | length 42.8
  Top Layer w0.254: v1(17,32) 17,33.032 17.27,33.302 17.27,33.879 17.397,34.006 U5.16
  Bottom Layer w0.254: v1(17,32) 17,25.061 22.515,19.545 22.515,19.485 28,14 37.05,14 43.05,20 R19.1
RE2.4: R20.1 U5.17 | length 41.8
  Top Layer w0.254: v1(18,32) 19.379,32 19.506,32.127 U5.17
  Bottom Layer w0.254: v1(18,32) 18,25 28,15 34.05,15 43.05,24 R20.1
Reset_uC: JTAG2.6 U5.20 U8.1 | length 36.9
  Top Layer w0.254: U8.1 15.064,39.037 16.463,39.037 v1(16.485,39.015) ; v1(21.5,34) 21.5,33.906 21.893,33.513 U5.20
  Bottom Layer w0.254: v1(21.5,34) v1(16.485,39.015) 15.819,39.681 15.819,49.782 20.338,54.301 26.858,54.301 27.919,55.363 28.823,55.363 JTAG2.6
X_CAN_N: U1.1 U5.30 | length 21.2
  Top Layer w0.254: U5.30 30.021,32.507 30.021,33.113 30.047,33.138 30.047,36.982 31.073,38.008 31.073,38.733 ; v1(37,41.405) 37.094,41.405 37.368,41.679 37.693,41.679 37.845,41.832 U1.1
  Bottom Layer w0.254: v1(30.9,39) 30.9,39.094 31.073,39.267 31.073,39.891 31.768,40.587 39.037,40.587 39.496,41.046 39.496,41.256 39.347,41.405 v1(37,41.405)
X_CAN_P: U1.4 U5.31 | length 21.2
  Top Layer w0.254: U5.31 30.58,32.507 30.58,33.113 30.555,33.138 30.555,36.772 31.581,37.798 31.581,38.733 ; U1.4 41.655,41.832 41.807,41.679 42.132,41.679 42.406,41.405 v1(42.5,41.405)
  Bottom Layer w0.254: v1(31.754,39) 31.754,39.094 31.581,39.267 31.581,39.681 31.979,40.079 39.247,40.079 40.004,40.835 40.004,41.256 40.153,41.405 v1(42.5,41.405)
pads on no net: JTAG2.8 U5.1 U5.2 U5.3 U5.4 U5.5 U5.6 U5.7 U5.8 U5.9 U5.18 U5.19 U5.25 U5.26 U5.27 U5.28 U5.29 U5.32 U5.33 U5.34 U5.36 U5.38 U5.39 U5.40 U5.41 U5.42 U5.43 U5.44 U5.45 U5.58 U5.59 U5.60 U5.61 U5.62

## Polygon pours and split planes (outlines as drawn)
GND on Bottom Layer "GND_L02_P000" (solid, pour order 0): 10,61 55,61 55,10 10,10
GND on Top Layer "GND_L01_P001" (solid, remove dead copper, pour order 1): 10,61 55,61 55,10 10,10

## Silkscreen, mask and mechanical layers (free items; w line width, h text height)
Top Overlay:
  drawing of 38 lines, arcs and shapes, not listed

## Text inside footprints (layer, text, board x,y; h text height)
"D1 Fault": Top Overlay "+" at 50.7,33.3 h0.76 r270
"D2 Heart": Top Overlay "+" at 50.7,37.3 h0.76 r270
D3: Top Overlay "+" at 39.4,32.3 h0.76 r270